# Allegro board ESP323.brd
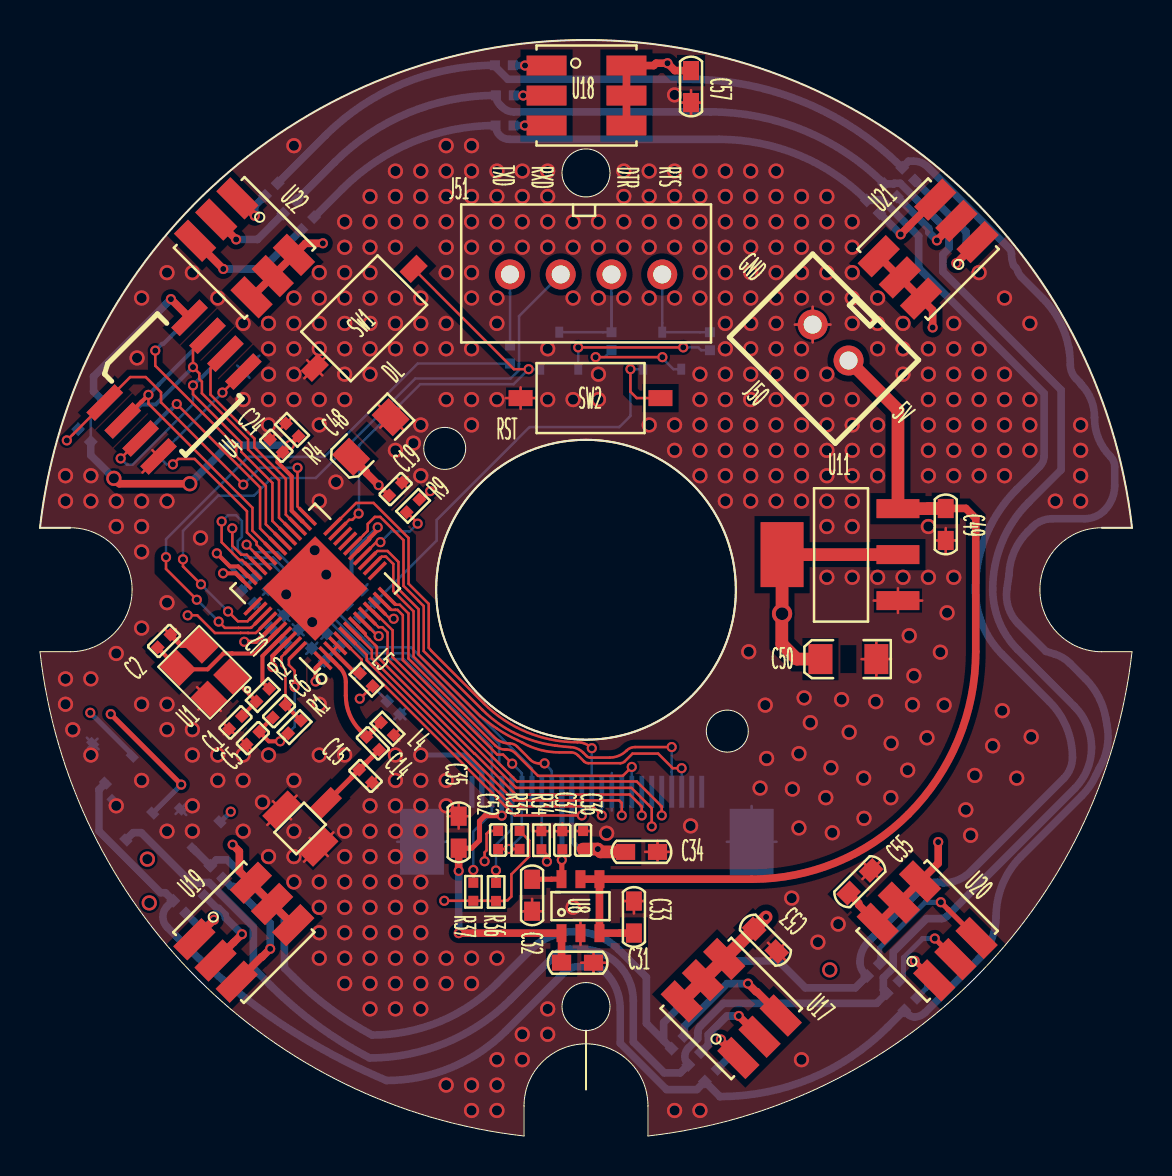
[diagram p0: board, top side]
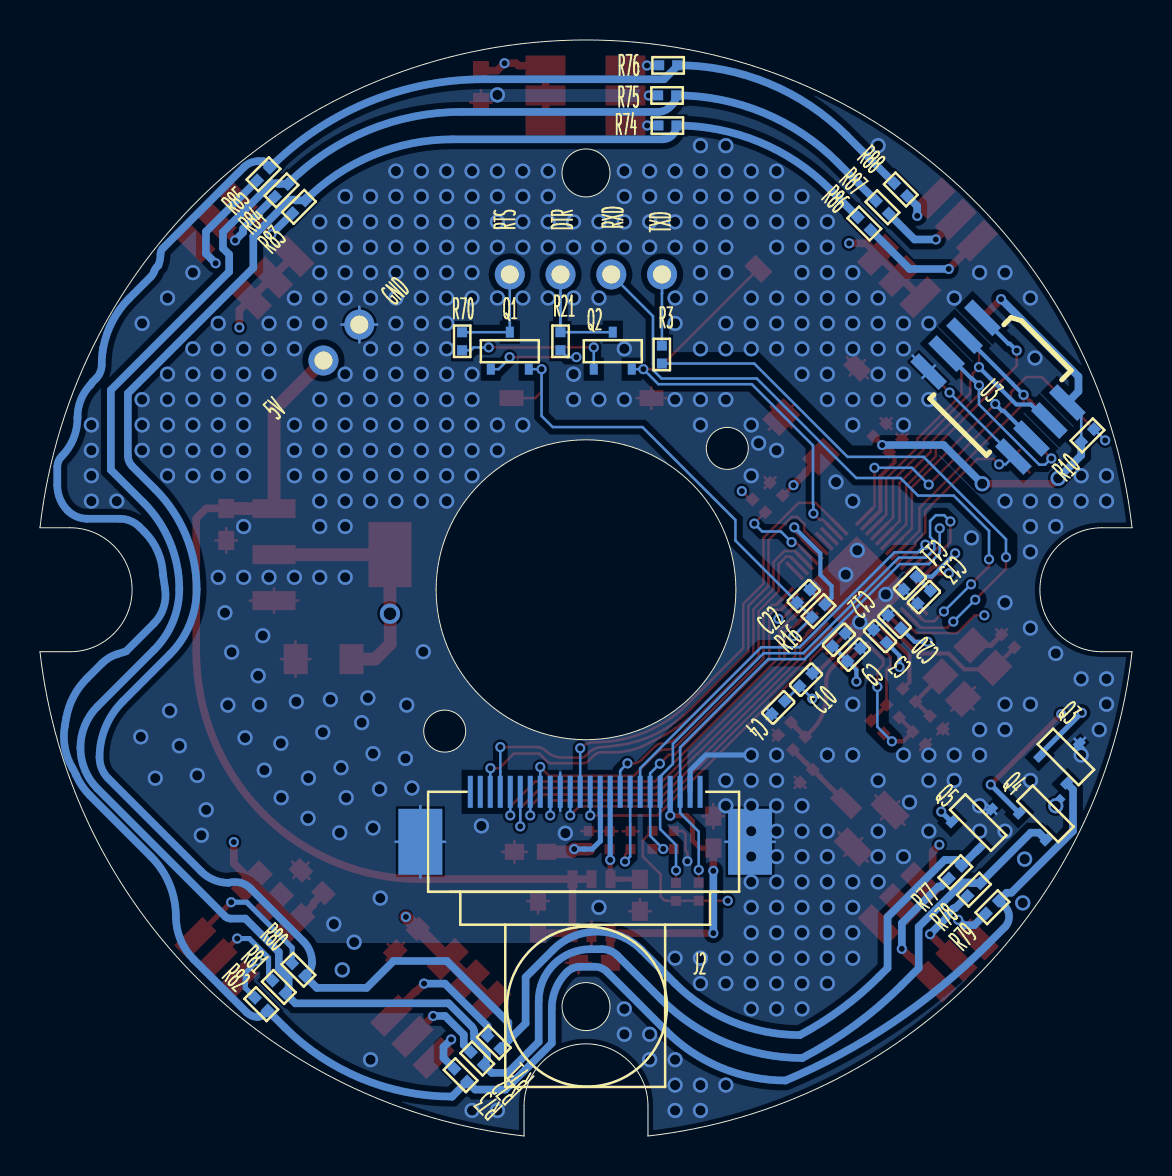
[diagram p1: board, bottom side, seen from below]

Outline 54.65 x 54.82 mm; copper layers: TOP, GND, SIG, BOTTOM. Coordinates in mm from the lower left corner of the outline.
Outline path: circle c20.25,34.4 r1.05 ; circle c27.32,48.17 r1.2 ; circle c27.32,27.32 r7.5 ; circle c27.32,6.47 r1.2 ; circle c34.4,20.25 r1.05 ; 0,30.42 arc(27.32,54.82) 54.65,30.42 53.14,30.42 arc(50.04,27.32) 53.14,24.22 54.65,24.22 arc(46.77,7.88) 30.42,0 30.42,1.51 arc(27.32,4.61) 24.22,1.51 24.22,0 arc(7.88,7.88) 0,24.22 1.51,24.22 arc(4.61,27.32) 1.51,30.42 0,30.42

## Design rules (mm)
net group DTR: nets DTR N16908429
net group RTS: nets N16908427 RTS
net group LED_B: nets LED_B N16960286 N16960785 N16961158 N16961522 N16961899 N16962291
net group LED_G: nets LED_G N16960306 N16960795 N16961160 N16961524 N16961901 N16962293
net group LED_R: nets LED_R N16960332 N16960797 N16961162 N16961526 N16961903 N16962295
net group RF: nets N16860839 N16860948 N16861170 N16861179 N16861214 N16861260 N16861530 N16861598 N16884685

## Placement (name value [footprint] x y rotation side)
C1  22pF/6.3V(10%)  [C0402]  10.11 21 225 top
C2  22pF/6.3V(10%)  [C0402]  5.89 24.44 45 top
C3  100pF/6.3V(10%)  [C0402]  12.29 24.68 45 bottom
C4  0.1uF/6.3V(10%)  [C0402]  17.38 21.75 315 bottom
C5  10nF/6.3V(10%)  [C0402]  10.98 20.22 225 top
C6  3.3nF/6.3V(10%)  [C0402]  12.29 21.57 225 top
C9  0.1uF/6.3V(10%)  [C0402]  14.24 23.76 135 bottom
C10  0.1uF/6.3V(10%)  [C0402]  16.63 22.51 135 bottom
C11  1uF/10V(20%)  [C0402]  10.79 27.98 315 bottom
C12  10uF/6.3V(20%)  [C0402]  14.99 24.51 135 bottom
C13  10uF/6.3V(20%)  [C0402]  10.09 27.27 315 bottom
C14  6.8pF  [C0402]  16.34 19.97 314.3 top
C15  2.4pF  [C0402]  16.61 17.69 135 top
C19  0.1uF/6.3V(10%)  [C0402]  17.48 32.04 45 top
C20  1uF/10V(20%)  [C0402]  11.57 25.41 45 bottom
C22  1uF/10V(20%)  [C0402]  16.75 26.69 135 bottom
C24  1uF/10V(20%)  [C0402]  12.15 34.21 135 top
C31  10uF/10V(20%)  [C0603]  27.7 8.67 180 top
C32  10uF/10V(20%)  [C0603]  24.63 11.24 90 top
C33  10uF/10V(20%)  [C0603]  29.72 11.75 270 top
C34  4.7uF/10V(20%)  [C0603]  29.3 14.21 0 top
C35  4.7uF/10V(20%)  [C0603]  20.95 14.4 90 top
C36  0.1uF/16V(10%)  [C0402]  27.18 14.35 90 top
C37  1uF/10V(20%)  [C0402]  26.14 14.35 90 top
C48  47uF/6.3V(20%)  [C1206]  15.57 33.98 225 top
C49  10uF/16V  [C0603]  45.33 31.39 270 top
C50  22uF/16V  [C1206]  39.05 23.86 180 top
C52  1uF/10V(20%)  [C0402]  22.93 14.36 90 top
C53  0.1uF/16V  [C0603]  35.74 10.36 315 top
C55  0.1uF/16V  [C0603]  40.46 12.16 45 top
C57  0.1uF/16V  [C0603]  32.58 53.29 270 top
J2  FFC_24P_0P5  [OV9650FSL_PCB]  21.61 17.22 180 bottom
J39  IPEX  [ECT8180001581]  14.3 16.65 135 top
J50  CON2  [XH_2_54_2P]  38.67 40.59 315 top
J51  CON4  [XH_2_54_4P]  23.52 43.1 0 top
L4  2.4nH  [R0402]  17.07 20.69 315 top
L5  2.0nH  [R0402]  16.01 23.14 315 top
Q1  S8050(NPN)  [SOT23-3]  31.14 40.21 180 bottom
Q2  S8050(NPN)  [SOT23-3]  25.99 40.21 180 bottom
Q3  S8050(NPN)  [SOT23-3]  2.64 19.63 225 bottom
Q4  S8050(NPN)  [SOT23-3]  3.66 16.79 225 bottom
Q5  S8050(NPN)  [SOT23-3]  7.03 16.35 225 bottom
R1  20K(5%)  [R0402]  13.06 20.78 225 top
R2  51R(5%)  [R0402]  10.84 21.74 45 top
R3  499R(1%)  [R0402]  23.53 38.64 90 bottom
R4  2K/NC  [R0402]  12.94 35 135 top
R9  10K(1%)(NC)  [R0402]  18.99 31.84 225 top
R10  10K(1%)  [R0402]  2.54 34.72 135 bottom
R16  10K(1%)  [R0402]  15.37 26.58 315 bottom
R21  12K(1%)  [R0402]  28.6 40.21 270 bottom
R34  10K(1%)  [R0402]  25.09 15.25 270 top
R35  10K(1%)  [R0402]  24 15.26 270 top
R36  3.3K(5%)  [R0402]  22.82 12.66 270 top
R37  3.3K(5%)  [R0402]  21.69 12.67 270 top
R70  12K(1%)  [R0402]  33.53 40.21 270 bottom
R71  470  [R0402]  31.61 4.37 45 bottom
R72  470  [R0402]  32.44 3.56 45 bottom
R73  470  [R0402]  33.27 2.73 45 bottom
R74  470  [R0402]  22.8 50.55 0 bottom
R75  470  [R0402]  22.81 52.05 0 bottom
R76  470  [R0402]  22.76 53.56 0 bottom
R77  470  [R0402]  8.53 13.52 315 bottom
R78  470  [R0402]  7.59 12.65 315 bottom
R79  470  [R0402]  6.67 11.77 315 bottom
R80  470  [R0402]  41.39 8 45 bottom
R81  470  [R0402]  42.37 7.14 45 bottom
R82  470  [R0402]  43.25 6.28 45 bottom
R83  470  [R0402]  41.37 46.8 315 bottom
R84  470  [R0402]  42.25 47.62 315 bottom
R85  470  [R0402]  43.15 48.43 315 bottom
R86  470  [R0402]  13.72 45.96 225 bottom
R87  470  [R0402]  12.81 46.77 225 bottom
R88  470  [R0402]  11.9 47.66 225 bottom
SW1  SW PUSHBUTTON  [KEY_3X6]  13.75 38.43 45 top
SW2  SW PUSHBUTTON  [KEY_3X6]  24.05 36.91 0 top
U1  40MHz+/-10ppm  [CRY_3225]  8.46 21.86 135 top
U2  ESP32-D0WD  [QFN48_5X5]  13.77 27.39 135 top
U3  EN25QH128A  [RZ7889]  8.86 35.2 225 bottom
U4  PSRAM64H  [RZ7889]  8.97 35.32 45 top
U8  RT9011-BM-PJ6  [SOT-23-6]  27.05 11.5 0 top
U11  TLV1117-33IDCY  [SOT223]  42.94 26.78 90 top
U17  RGB  [RGB_6]  34.59 6.38 315 top
U18  RGB  [RGB_6]  27.35 52.05 180 top
U19  RGB  [RGB_6]  10.2 10.19 225 top
U20  RGB  [RGB_6]  44.4 10.26 315 top
U21  RGB  [RGB_6]  44.45 44.36 45 top
U22  RGB  [RGB_6]  10.23 44.43 135 top

## Library data of the parts
C1-C6 C9-C15 C19 C20 C22 C24 C31-C37 C48-C50 C52 C53 C55 C57 = CAP NP
J2 = CON24_4
J39 = IPEX_0
J50 = CON2
J51 = CON4
L4 L5 = CHOKE
Q1-Q5 = NPN BCE
R1-R4 R9 R10 = RESISTOR
R16 = RESISTOR_0: signal model: DEFAULT_RESISTOR_10000OHM_1_2
R21 R34-R37 R70-R88 = RESISTOR_0: signal model: DEFAULT_RESISTOR_200OHM_1_2
SW1 = SW PUSHBUTTON_0
SW2 = SW PUSHBUTTON
U1 = X1_1
U2 = ESP8080_24
U3 = FLASH_3
U4 = PN18S32
U8 = NCP1117_3
U11 = TLV1117-33IDCY
U17-U22 = LED_RGB

## Footprints (pads in the part's own frame, mm; a bottom-side part is the same pattern mirrored in y, then rotated)
C0402
  rect 0.5x0.5 smd: 1(0,0) 2(0.9,0)
C0603
  rect 0.96x0.8 smd: 1(0,0) 2(1.6,0)
C1206
  rect 1.2x1.5 smd: 1(0,0) 2(-2.8,0)
CRY_3225
  rect 1.4x1.2 smd: 1(0,-1.6) 2(2.2,-1.6) 3(2.2,0) 4(0,0)
ECT8180001581
  rect 0.8x1.5 smd: 1(0,0)
  rect 1x1.8 smd: 2(-1.3,1.8) 3(1.3,1.8)
KEY_3X6
  rect 1.2x0.8 smd: 1(0,0) 2(7,0)
OV9650FSL_PCB
  rect 0.25x1.6 smd: 1(0,0) 2(-0.5,0) 3(-1,0) 4(-1.5,0) 5(-2,0) 6(-2.5,0) 7(-3,0) 8(-3.5,0) 9(-4,0) 10(-4.5,0) 11(-5,0) 12(-5.5,0) 13(-6,0) 14(-6.5,0) 15(-7,0) 16(-7.5,0) 17(-8,0) 18(-8.5,0) 19(-9,0) 20(-9.5,0) 21(-10,0) 22(-10.5,0) 23(-11,0) 24(-11.5,0)
  rect 2.2x3.3 smd: 25(-14,-2.5) 26(2.5,-2.5)
QFN48_5X5
  rect 1.2x0.18 smd: 1(-2.825,2.275) 2(-2.825,1.925) 3(-2.825,1.575) 4(-2.825,1.225) 5(-2.825,0.875) 6(-2.825,0.525) 7(-2.825,0.175) 8(-2.825,-0.175) 9(-2.825,-0.525) 10(-2.825,-0.875) 11(-2.825,-1.225) 12(-2.825,-1.575) 13(-2.825,-1.925) 14(-2.825,-2.275) 25(2.825,-2.275) 26(2.825,-1.925) 27(2.825,-1.575) 28(2.825,-1.225) 29(2.825,-0.875) 30(2.825,-0.525) 31(2.825,-0.175) 32(2.825,0.175) 33(2.825,0.525) 34(2.825,0.875) 35(2.825,1.225) 36(2.825,1.575) 37(2.825,1.925) 38(2.825,2.275)
  rect 0.18x1.2 smd: 15(-1.575,-2.825) 16(-1.225,-2.825) 17(-0.875,-2.825) 18(-0.525,-2.825) 19(-0.175,-2.825) 20(0.175,-2.825) 21(0.525,-2.825) 22(0.875,-2.825) 23(1.225,-2.825) 24(1.575,-2.825) 39(1.575,2.825) 40(1.225,2.825) 41(0.875,2.825) 42(0.525,2.825) 43(0.175,2.825) 44(-0.175,2.825) 45(-0.525,2.825) 46(-0.875,2.825) 47(-1.225,2.825) 48(-1.575,2.825)
  rect 3.7x3.7 smd: 49(0,0)
R0402
  rect 0.5x0.5 smd: 1(0,0) 2(0.9,0)
RGB_6
  rect 2x1 smd: 1(2,-1.5) 2(2,0) 3(2,1.5) 4(-2,1.5) 5(-2,0) 6(-2,-1.5)
RZ7889
  rect 2x0.6 smd: 1(-3.082,5.025) 2(-3.082,3.755) 3(-3.082,2.485) 4(-3.082,1.215) 5(2.918,1.215) 6(2.918,2.485) 7(2.918,3.755) 8(2.918,5.025)
SOT23-3
  rect 0.4x0.55 smd: 1(-0.95,-1.85) 2(0.95,-1.85) 3(0,0)
SOT223
  rect 0.95x2.15 smd: 1(0,0) 2(2.3,0) 3(4.6,0)
  rect 3.25x2.15 smd: 4(2.3,5.8)
SOT-23-6
  rect 0.5x0.9 smd: 1(-0.95,-1.35) 2(0,-1.35) 3(0.95,-1.35) 4(0.95,1.35) 5(0,1.35) 6(-0.95,1.35)
XH_2_54_2P
  round 1.5 hole 0.9: 1(0,0) 2(2.54,0)
XH_2_54_4P
  round 1.5 hole 0.9: 1(0,0) 2(2.54,0) 3(5.08,0) 4(7.62,0)

## Nets
AGND: C1.2 C2.2 C3.2 C4.2 C5.2 C9.2 C10.2 C11.2 C12.2 C13.2 C15.1 C19.2 C20.2 C22.2 C24.2 C31.1 C32.1 C33.1 C34.2 C35.2 C36.2 C37.2 C48.2 C49.2 C50.2 C52.2 C53.2 C55.2 C57.2 J2.2(AGND) J2.15(DGND) J2.25(GND#25) J2.26(GND#26) J39.2(GND1) J39.3(GND2) J50.1 L4.2 Q3.3(E) Q4.3(E) Q5.3(E) R4.2 R34.1 SW1.1 SW2.1 U1.2(GND#2) U1.4(GND#4) U2.49(GND) U3.4(GND) U4.4(VSS) U8.2(GND) U11.1(ADJ/GND)
AVDD_2V8: C31.2 C35.1 J2.4(AVDD) U8.1(VOUT2)
DVDD_1V3: C32.2 C37.1 J2.10(DVDD) U8.6(VOUT1)
VBUS: C33.2 C49.1 J50.2 U8.3(EN2) U8.4(EN1) U8.5(VIN) U11.3(INPUT)
VDD_SDIO: C24.1 R4.1 R10.1 U2.26(VDD_SDIO) U3.8(VCC) U4.8(VDD)
B: Q5.1(B) U2.12(32K_XP)
CAM_RESET: C52.1 J2.6(RESET) R35.2 U2.13(32K_XN)
DOVDD_3V3: C3.1 C4.1 C9.1 C10.1 C11.1 C12.1 C13.1 C19.1 C20.1 C34.1 C36.1 C48.1 C50.1 C53.1 C55.1 C57.1 J2.11(DOVDD) L5.2 R9.1 R16.1 R35.1 R36.2 R37.2 U2.1(VDDA#1) U2.19(VDD3P3_RTC) U2.37(VDD3P3_CPU) U2.43(VDDA#43) U2.46(VDDA#46) U11.2(OUTPUT#2) U11.4(OUTPUT#4) U17.4(BA) U17.5(GA) U17.6(RA) U18.4(BA) U18.5(GA) U18.6(RA) U19.4(BA) U19.5(GA) U19.6(RA) U20.4(BA) U20.5(GA) U20.6(RA) U21.4(BA) U21.5(GA) U21.6(RA) U22.4(BA) U22.5(GA) U22.6(RA)
DTR: J51.3 Q2.3(E) R21.1
DVP_HREF: J2.9(HREF) U2.16(GPIO27)
DVP_PCLK: J2.17(PCLK) U2.14(GPIO25)
DVP_VSYNC: J2.7(VSYNC) U2.34(GPIO5)
DVP_Y2: J2.19(Y2) U2.10(VDET_1)
DVP_Y3: J2.21(Y3) U2.20(MTCK)
DVP_Y4: J2.22(Y4) U2.17(MTMS)
DVP_Y5: J2.20(Y5) U2.11(VDET_2)
DVP_Y6: J2.18(Y6) U2.8(SENSOR_VN)
DVP_Y7: J2.16(Y7) U2.7(SENSOR_CAPN)
DVP_Y8: J2.14(Y8) U2.6(SENSOR_CAPP)
DVP_Y9: J2.12(Y9) U2.5(SENSOR_VP)
EN: C22.1 Q1.2(C) R16.2 SW2.2 U2.9(CHIP_PU)
FLASH_CLK: U2.31(SD_CLK) U3.6(CLK)
G: Q4.1(B) U2.38(GPIO19)
I2C_SCL: J2.5(SCL) R36.1 U2.36(GPIO23)
I2C_SDA: J2.3(SDA) R37.1 U2.35(GPIO18)
IO0: Q2.2(C) SW1.2 U2.23(GPIO0)
IO4: J2.13(XCLK) U2.24(GPIO4)
IO12: R9.2 U2.18(MTDI)
IO16: R10.2 U2.25(GPIO16) U4.1(CS#)
IO17: U2.27(GPIO17) U4.6(SCLK)
IO21: Q3.1(B) U2.42(GPIO21)
LED_B: Q5.2(C) R71.1 R74.1 R77.1 R80.1 R83.1 R86.1
LED_G: Q4.2(C) R72.1 R75.1 R78.1 R81.1 R84.1 R87.1
LED_R: Q3.2(C) R73.1 R76.1 R79.1 R82.1 R85.1 R88.1
PWDN: J2.8(PWDN) R34.2
RTS: J51.4 Q1.3(E) R70.1
RXD0: J51.2 U2.40(U0RXD)
SCS/CMD: U2.30(SD_CMD) U3.1(/CS)
SDI/SD1: U2.33(SD_DATA_1) U3.5(DI) U4.5(SI/SIO0)
SDO/SD0: U2.32(SD_DATA_0) U3.2(DO) U4.2(SO/SIO1)
SHD/SD2: U2.28(SD_DATA_2) U3.7(/HOLD) U4.7(SIO3)
SWP/SD3: U2.29(SD_DATA_3) U3.3(/WP) U4.3(SIO2)
TXD0: J51.1 R3.2
N16860839: C5.1 C6.2 R1.2 U2.48(CAP1)
N16860948: L5.1 U2.3(VDD3P3#3) U2.4(VDD3P3#4)
N16861170: C14.2 C15.2 J39.1(RF)
N16861179: C2.1 U1.3(XOUT) U2.44(XTAL_N)
N16861214: C1.1 R2.1 U1.1(XIN)
N16861260: C6.1 R1.1 U2.47(CAP2)
N16861530: R3.1 U2.41(U0TXD)
N16861598: R2.2 U2.45(XTAL_P)
N16884685: C14.1 L4.1 U2.2(LNA_IN)
N16908427: Q2.1(B) R70.2
N16908429: Q1.1(B) R21.2
N16960286: R71.2 U17.3(BK)
N16960306: R72.2 U17.2(GK)
N16960332: R73.2 U17.1(RK)
N16960785: R74.2 U18.3(BK)
N16960795: R75.2 U18.2(GK)
N16960797: R76.2 U18.1(RK)
N16961158: R77.2 U19.3(BK)
N16961160: R78.2 U19.2(GK)
N16961162: R79.2 U19.1(RK)
N16961522: R80.2 U20.3(BK)
N16961524: R81.2 U20.2(GK)
N16961526: R82.2 U20.1(RK)
N16961899: R83.2 U21.3(BK)
N16961901: R84.2 U21.2(GK)
N16961903: R85.2 U21.1(RK)
N16962291: R86.2 U22.3(BK)
N16962293: R87.2 U22.2(GK)
N16962295: R88.2 U22.1(RK)

Pads without a net: J2 1 23 24; U2 15 21 22 39

## Via types
v1: diameter 0.508, hole 0.305, TOP to BOTTOM, 96 vias
v2: diameter 0.762, hole 0.508, TOP to BOTTOM, 417 vias
v3: diameter 1.016, hole 0.635, TOP to BOTTOM, 1 via

## Routing (per net, layer and track width the routed paths; a pad name or vN(x,y) marks a point on that pad's centre or on a via; arc(x,y) is an arc through that point)
AGND: length 105.8
  TOP w0.127: 27.05,10.74 U8.2 27.05,9.56 ; 23.31,36.91 SW2.1 ; SW2.1 24.05,36.37 ; SW2.1 24.79,36.91 ; SW2.1 24.05,37.45 ; 6.8,25.36 C2.2 6.25,25.36 ; 29.18,11.75 C33.1 ; C33.1 29.72,11.13 ; C33.1 30.26,11.75 ; U11.1 44.15,26.78 ; U11.1 42.94,27.4 ; U11.1 42.94,26.17 ; U11.1 41.72,26.78 ; 30.28,14.21 C34.2 ; C34.2 30.9,14.75 ; C34.2 30.9,13.67 ; C34.2 31.52,14.21 ; 9.19,20.09 C1.2 ; C1.2 9.19,20.64 ; C1.2 9.74,20.09 ; C50.2 41.86,24.75 ; C50.2 41.12,23.86 ; C50.2 41.86,22.97 ; C50.2 42.59,23.86 ; C5.2 10.61,19.31 ; C5.2 10.06,19.31 ; C5.2 10.06,19.86 ; 7.93,21.34 U1.4 ; U1.4 9.05,21.27 ; U1.4 7.86,22.45 ; 27.57,15.25 C36.2 26.79,15.25 ; 16.92,36.59 C48.2 ; C48.2 18.18,35.33 ; C48.2 17.03,35.43 ; C48.2 18.07,36.48 ; C57.2 33.12,51.69 ; C57.2 32.58,51.07 ; C57.2 32.58,52.31 ; C57.2 32.04,51.69 ; R4.2 12.58,35.92 ; R4.2 12.03,35.36 ; R4.2 12.03,35.92 ; C19.2 18.39,32.96 ; C19.2 18.39,32.4 ; C19.2 17.84,32.96 ; C55.2 42.03,13.73 ; C55.2 41.97,12.91 ; C55.2 41.15,12.85 ; C55.2 41.21,13.67 ; C32.1 24.63,11.86 ; C32.1 25.17,11.24 ; C32.1 24.09,11.24 ; 37.78,40.59 J50.1 ; J50.1 38.67,41.48 ; J50.1 38.67,39.7 ; J50.1 39.56,40.59 ; 5.62,34.31 U4.4 5.13,33.19 ; C52.2 22.49,15.26 22.35,15.12 22.35,14.28 22.25,14.19 v1(22.25,13.74) ; 13.21,13.72 J39.2 ; J39.2 13.5,14.91 ; J39.2 14.68,15.19 ; J39.2 14.4,14 ; R34.1 25.48,15.25 ; R34.1 25.09,15.64 ; R34.1 24.7,15.25 ; 13.37,38.81 SW1.1 ; SW1.1 14.27,38.95 ; SW1.1 13.23,37.9 ; SW1.1 14.13,38.05 ; 36.49,8.85 C53.2 ; C53.2 36.43,9.67 ; C53.2 37.31,8.79 ; C53.2 37.25,9.61 ; C37.2 26.53,15.25 ; C37.2 26.14,15.64 ; C37.2 25.75,15.25 ; 27.08,8.67 C31.1 ; C31.1 27.7,8.13 ; C31.1 28.32,8.67 ; C31.1 27.7,9.21 ; C15.1 16.89,17.41 ; C15.1 16.89,17.97 ; C15.1 16.33,17.41 ; 11.23,35.12 C24.2 11.78,35.12 ; J39.3 12.56,15.84 ; J39.3 11.66,16.75 ; J39.3 11.38,15.56 ; J39.3 12.85,17.03 ; 20.95,15.38 C35.2 ; C35.2 20.95,16.62 ; C35.2 20.41,16 ; C35.2 21.49,16 ; 45.33,29.17 C49.2 ; C49.2 45.33,30.41 ; C49.2 45.87,29.79 ; C49.2 44.79,29.79 ; 17.98,19.78 L4.2 17.98,20.33
  TOP w0.254: C2.2 7.06,24.55 U1.2
  GND w0.127: 37.78,40.59 J50.1 ; J50.1 39.56,40.59 ; J50.1 38.67,41.48 ; J50.1 38.67,39.7
  BOTTOM w0.127: Q3.3 2.88,19.87 ; Q3.3 2.4,19.39 ; Q3.3 2.93,19.34 ; Q3.3 2.35,19.93 ; C10.2 16.27,23.42 ; C10.2 15.72,23.42 ; C10.2 15.72,22.87 ; 13.33,24.12 C9.2 ; C9.2 13.88,24.67 ; C9.2 13.33,24.67 ; C13.2 11,26.36 ; C13.2 11,26.91 ; C13.2 10.45,26.36 ; 11.93,26.32 C20.2 ; C20.2 12.48,25.77 ; C20.2 12.48,26.32 ; 34.37,14.72 J2.25 ; J2.25 35.61,16.51 ; J2.25 35.61,12.93 ; J2.25 36.85,14.72 ; C3.2 13.2,25.04 ; C3.2 12.65,25.6 ; C3.2 13.2,25.6 ; 37.78,40.59 J50.1 ; J50.1 38.67,39.7 ; J50.1 38.67,41.48 ; J50.1 39.56,40.59 ; C4.2 18.29,20.84 ; C4.2 17.74,20.84 ; C4.2 18.29,21.39 ; 15.84,27.05 C22.2 ; C22.2 16.39,27.6 ; C22.2 15.84,27.6 ; J2.26 19.11,16.51 ; J2.26 17.87,14.72 ; J2.26 19.11,12.93 ; J2.26 20.35,14.72 ; U3.4 10.49,37.92 ; U3.4 9.86,38.55 ; U3.4 10.98,39.04 ; 14.08,25.42 C12.2 14.08,24.87 ; Q5.3 7.32,16.06 ; Q5.3 6.79,16.11 ; Q5.3 7.27,16.59 ; C11.2 11.71,27.07 ; C11.2 11.71,27.62 ; C11.2 11.15,27.07 ; 28.61,16.28 J2.15 28.61,18.16
  BOTTOM w0.254: J2.2 22.11,18.27 21.33,19.06 v2(19.06,19.06)
  vias: v2(1.28,33.03) v2(1.28,31.76) v2(1.28,22.87) v2(1.28,21.6) v2(1.64,20.32) v2(2.55,33.03) v2(2.55,31.76) v2(2.55,22.87) v2(2.55,19.06) v2(3.82,31.76) v2(3.82,30.49) v2(3.82,24.14) v2(3.82,16.52) v2(4.86,38.92) v2(5.09,41.92) v2(5.09,31.76) v2(5.09,30.49) v2(5.09,29.22) v2(5.09,25.41) v2(5.09,21.6) v2(5.09,17.79) v2(6.36,43.19) v2(6.36,31.76) v2(6.36,26.68) v2(6.36,21.6) v2(6.36,20.33) v2(6.36,15.25) v2(7.63,43.19) v2(7.63,20.33) v2(7.63,19.06) v2(7.63,16.52) v2(7.63,15.25) v2(8.03,29.92) v2(8.9,41.92) v2(8.9,19.06) v2(8.9,17.79) v2(10.17,40.65) v2(10.17,36.84) v2(10.17,19.06) v2(10.17,17.79) v2(10.17,15.25) v2(11.13,16.7) v2(11.44,40.65) v2(11.44,39.38) v2(11.44,38.11) v2(11.44,36.84) v2(11.44,35.57) v2(11.44,19.06) v2(11.44,13.98) v2(12.32,27.09) v2(12.71,49.54) v2(12.71,41.92) v2(12.71,40.65) v2(12.71,39.38) v2(12.71,38.11) v2(12.71,36.84) v2(12.71,17.79) v2(12.71,15.25) v2(12.71,13.98) v2(12.71,12.71) v2(13.62,25.71) v2(13.75,29.3) v2(13.98,43.19) v2(13.98,41.92) v2(13.98,40.65) v2(13.98,39.38) v2(13.98,36.84) v2(13.98,35.57) v2(13.98,31.76) v2(13.98,21.6) v2(13.98,19.06) v2(13.98,12.71) v2(13.98,11.44) v2(13.98,10.17) v2(13.98,8.9) v2(14.33,28.08) v2(14.81,32.71) v2(15.25,45.73) v2(15.25,44.46) v2(15.25,43.19) v2(15.25,41.92) v2(15.25,40.65) v2(15.25,39.38) v2(15.25,38.11) v2(15.25,36.84) v2(15.25,19.06) v2(15.25,15.25) v2(15.25,13.98) v2(15.25,12.71) v2(15.25,11.44) v2(15.25,10.17) v2(15.25,8.9) v2(15.25,7.63) v2(16.52,47) v2(16.52,45.73) v2(16.52,44.46) v2(16.52,43.19) v2(16.52,41.92) v2(16.52,40.65) v2(16.52,39.38) v2(16.52,38.11) v2(16.52,16.52) v2(16.52,15.25) v2(16.52,13.98) v2(16.52,12.71) v2(16.52,11.44) v2(16.52,10.17) v2(16.52,8.9) v2(16.52,7.63) v2(16.52,6.36) v2(17.79,48.27) v2(17.79,47) v2(17.79,45.73) v2(17.79,44.46) v2(17.79,41.92) v2(17.79,40.65) v2(17.79,39.38) v2(17.79,34.3) v2(17.79,19.06) v2(17.79,17.79) v2(17.79,16.52) v2(17.79,15.25) v2(17.79,13.98) v2(17.79,12.71) v2(17.79,11.44) v2(17.79,10.17) v2(17.79,8.9) v2(17.79,7.63) v2(17.79,6.36) v2(18.69,34.66) v2(19.06,48.27) v2(19.06,47) v2(19.06,45.73) v2(19.06,41.92) v2(19.06,40.65) v2(19.06,39.38) v2(19.06,35.57) v2(19.06,33.03) v2(19.06,17.79) v2(19.06,16.52) v2(19.06,15.25) v2(19.06,13.98) v2(19.06,12.71) v2(19.06,11.44) v2(19.06,10.17) v2(19.06,8.9) v2(19.06,7.63) v2(19.06,6.36) v2(20.33,49.54) v2(20.33,48.27) v2(20.33,47) v2(20.33,45.73) v2(20.33,44.46) v2(20.33,43.19) v2(20.33,40.65) v2(20.33,39.38) v2(20.33,36.84) v2(20.33,17.79) v2(20.33,16.52) v2(20.33,8.9) v2(20.33,7.63) v2(20.33,2.55) v2(21.6,49.54) v2(21.6,48.27) v2(21.6,47) v2(21.6,45.73) v2(21.6,44.46) v2(21.6,43.19) v2(21.6,41.92) v2(21.6,39.38) v2(21.6,36.84) v2(21.6,35.57) v2(21.6,8.9) v2(21.6,7.63) v2(21.6,2.55) v2(21.6,1.28) v2(22.87,48.27) v2(22.87,47) v2(22.87,45.73) v2(22.87,44.46) v2(22.87,41.92) v2(22.87,40.65) v2(22.87,36.84) v2(22.87,8.9) v2(22.87,3.82) v2(22.87,2.55) v2(22.87,1.28) v2(24.14,48.27) v2(24.14,47) v2(24.14,45.73) v2(24.14,44.46) v2(24.14,5.09) v2(24.14,3.82) v2(25.41,48.27) v2(25.41,47) v2(25.41,45.73) v2(25.41,44.46) v2(25.41,39.38) v2(25.41,36.84) v2(25.41,6.36) v2(25.41,5.09) v2(26.68,45.73) v2(26.68,44.46) v2(26.68,41.92) v2(26.68,36.84) v2(26.68,11.44) v2(27.95,45.73) v2(27.95,44.46) v2(27.95,41.92) v2(27.95,38.11) v2(27.95,36.84) v2(28.36,15.15) v2(29.22,48.27) v2(29.22,47) v2(29.22,45.73) v2(29.22,44.46) v2(29.22,41.92) v2(30.49,48.27) v2(30.49,47) v2(30.49,45.73) v2(30.49,44.46) v2(30.49,41.92) v2(30.49,35.57) v2(31.76,52.08) v2(31.76,48.27) v2(31.76,47) v2(31.76,45.73) v2(31.76,44.46) v2(31.76,41.92) v2(31.76,35.57) v2(31.76,34.3) v2(31.76,1.28) v2(32.56,15.51) v2(33.03,48.27) v2(33.03,47) v2(33.03,45.73) v2(33.03,44.46) v2(33.03,43.19) v2(33.03,41.92) v2(33.03,38.11) v2(33.03,36.84) v2(33.03,35.57) v2(33.03,34.3) v2(33.03,33.03) v2(33.03,1.28) v2(34.3,48.27) v2(34.3,47) v2(34.3,45.73) v2(34.3,44.46) v2(34.3,43.19) v2(34.3,41.92) v2(34.3,40.65) v2(34.3,39.38) v2(34.3,38.11) v2(34.3,36.84) v2(34.3,35.57) v2(34.3,34.3) v2(34.3,33.03) v2(34.3,31.76) v2(35.47,24.22) v2(35.57,48.27) v2(35.57,47) v2(35.57,45.73) v2(35.57,44.46) v2(35.57,43.19) v2(35.57,41.92) v2(35.57,40.65) v2(35.57,39.38) v2(35.57,38.11) v2(35.57,36.84) v2(35.57,35.57) v2(35.57,34.3) v2(35.57,33.03) v2(35.57,31.76) v2(36.04,17.41) v2(36.29,21.55) v2(36.36,18.89) v2(36.84,48.27) v2(36.84,47) v2(36.84,45.73) v2(36.84,44.46) v2(36.84,43.19) v2(36.84,41.92) v2(36.84,40.65) v2(36.84,39.38) v2(36.84,38.11) v2(36.84,36.84) v2(36.84,35.57) v2(36.84,34.3) v2(36.84,33.03) v2(36.84,31.76) v2(37.65,17.35) v2(37.62,11.9) v2(37.98,19.13) v2(37.98,15.41) v2(38.11,47) v2(38.11,45.73) v2(38.11,44.46) v2(38.11,43.19) v2(38.11,41.92) v2(38.11,39.38) v2(38.11,38.11) v2(38.11,36.84) v2(38.11,35.57) v2(38.11,34.3) v2(38.11,33.03) v2(38.11,31.76) v2(38.11,3.82) v2(38.24,21.92) v2(38.55,20.68) v2(38.93,9.7) v2(39.32,16.92) v2(39.38,47) v2(39.38,45.73) v2(39.38,44.46) v2(39.38,43.19) v2(39.38,41.92) v2(39.38,38.11) v2(39.38,36.84) v2(39.38,35.57) v2(39.38,34.3) v2(39.38,33.03) v2(39.38,31.76) v2(39.38,30.49) v2(39.38,27.95) v2(39.58,18.42) v2(39.65,15.17) v2(39.94,10.6) v2(40.12,21.83) v2(40.5,20.19) v2(40.65,45.73) v2(40.65,44.46) v2(40.65,43.19) v2(40.65,41.92) v2(40.65,40.65) v2(40.65,36.84) v2(40.65,35.57) v2(40.65,34.3) v2(40.65,33.03) v2(40.65,31.76) v2(40.65,30.49) v2(40.65,27.95) v2(41.22,17.9) v2(41.24,15.89) v2(41.82,21.73) v2(41.92,41.92) v2(41.92,40.65) v2(41.92,39.38) v2(41.92,35.57) v2(41.92,34.3) v2(41.92,33.03) v2(41.92,27.95) v2(42.6,19.64) v2(42.58,16.92) v2(43.19,40.65) v2(43.19,39.38) v2(43.19,38.11) v2(43.19,27.95) v2(43.42,18.3) v2(43.5,25.03) v2(43.66,21.57) v2(43.73,23.02) v2(44.46,39.38) v2(44.46,38.11) v2(44.46,36.84) v2(44.46,35.57) v2(44.46,34.3) v2(44.46,33.03) v2(44.46,30.49) v2(44.46,27.95) v2(44.39,19.92) v2(45.06,24.2) v2(45.25,21.55) v2(45.39,26.17) v2(45.73,40.65) v2(45.73,39.38) v2(45.73,38.11) v2(45.73,36.84) v2(45.73,35.57) v2(45.73,34.3) v2(45.73,33.03) v2(45.73,27.95) v2(46.33,16.32) v2(46.57,15.04) v2(46.78,18.04) v2(47,43.19) v2(47,39.38) v2(47,38.11) v2(47,36.84) v2(47,35.57) v2(47,34.3) v2(47,33.03) v2(47.67,19.52) v2(48.16,21.27) v2(48.27,41.92) v2(48.27,38.11) v2(48.27,36.84) v2(48.27,35.57) v2(48.27,34.3) v2(48.27,33.03) v2(48.88,17.9) v2(49.54,40.65) v2(49.54,36.84) v2(49.54,35.57) v2(49.54,34.3) v2(49.6,19.97) v2(50.81,31.76) v2(52.08,35.57) v2(52.08,34.3) v2(52.08,33.03) v2(52.08,31.76)
AVDD_2V8: length 15.5
  TOP w0.254: v1(23.11,16.03) 22.27,16.03 22,15.75 22,14.78 21.61,14.4 C35.1
  TOP w0.381: C35.1 20.95,14.4 v1(20.95,13.26) ; C31.2 26.1,10.15 U8.1 v1(20.95,10.15)
  BOTTOM w0.254: v1(23.11,16.03) 23.11,17.21 J2.4
  BOTTOM w0.381: v1(20.95,10.15) v1(20.95,13.26)
DVDD_1V3: length 6.4
  TOP w0.254: C37.1 26.11,14.32 v1(26.11,13.81) 26.11,12.86 U8.6 25.59,12.85 25.59,12.84 C32.2
  BOTTOM w0.254: J2.10 v1(26.11,13.81)
VBUS: length 49.9
  TOP w0.381: U8.4 U8.3 29,10.15 29.01,10.15 C33.2 ; U8.4 U8.5 ; U8.4 35.62,12.85 arc(39.86,13.69) 43.46,16.09 arc(45.95,19.83) 46.83,24.23 46.83,30.89 46.33,31.39 45.33,31.39 C49.1
  TOP w0.635: J50.2 42.94,36.32 U11.3 44.48,31.38 44.48,31.39 C49.1
VDD_SDIO: length 27.8
  TOP w0.203: C24.1 11.89,33.95 11.89,33.7 12.6,33 12.6,31.28 13.13,30.75 U2.26
  TOP w0.254: C24.1 v1(12.5,34.56) R4.1
  TOP w0.381: v2(7.49,32.63) 3.97,32.63 3.7,32.9 v2(3.7,32.9) ; U4.8 v1(6.55,41.86)
  BOTTOM w0.127: R10.1 2.54,35.99 U3.8
  BOTTOM w0.381: v1(6.55,41.86) 2.68,37.99 2.68,37.24 U3.8 ; R10.1 2.54,34.05 v2(3.7,32.9) ; v1(12.5,34.56) 9.43,34.56 v2(7.49,32.63)
B: length 14.9
  TOP w0.127: v1(17.7,25.87) 17.51,25.87 U2.12
  SIG w0.203: v1(17.7,25.87) 17.7,24.37 9.9,16.57 9.89,16.57 v1(9.55,16.22)
  BOTTOM w0.254: Q5.1 9.04,15.71 v1(9.55,16.22)
CAM_RESET: length 18.3
  TOP w0.127: R35.2 24,14.36 v1(23.46,14.36) 23.46,14.36 C52.1 ; U2.13 17.56,26.32 17.78,26.32 17.79,26.32 17.89,26.32 18.16,26.05 18.16,23.81 22.88,19.08 23.18,19.08 v1(23.63,18.63)
  GND w0.127: 22.64,19.34 22.9,19.08 23.18,19.08 v1(23.63,18.63)
  BOTTOM w0.127: v1(23.63,18.63) 24.11,18.14 J2.6 24.11,15.01 v1(23.46,14.36)
DOVDD_3V3: length 88.6
  TOP w0.127: v1(20.23,11.77) R37.2 22.38,11.77 22.38,11.76 R36.2 23.26,11.76 23.29,11.79 23.4,11.79 23.59,11.98 23.59,13.09 24.48,13.98 24.48,14.78 R35.1 ; v1(16,21.88) 16.02,21.88 L5.2 ; R9.1 19.11,31.84 v1(19.53,32.26)
  TOP w0.203: U2.43 11.06,24.93 11.02,24.93 10.81,24.72 v1(10.22,24.72) ; U2.19 16.48,29.85 16.48,29.89 16.9,30.32 v1(16.9,30.45) ; C19.1 17.46,32.04 v1(16.94,32.56) ; v1(11.63,23.46) 11.63,24.01 U2.46 ; v1(13.79,22.73) 13.79,23.41 U2.1 ; U2.37 10.38,28.02 9.91,28.49 9.5,28.49 v1(8.85,29.15)
  TOP w0.381: v1(44.95,14.7) 44.95,13.64 U20.4 U20.5 U20.6 40.97,11.57 40.97,11.65 C55.1 ; C48.1 16.32,33.22 16.32,33.18 v1(16.94,32.56) ; U21.4 U21.5 U21.6 44.67,41.31 v1(44.67,40.44) ; v1(9.64,14.57) 9.98,14.24 9.98,13.25 U19.6 U19.5 U19.4 ; C57.1 31.77,53.29 v1(31.4,53.66) 30.83,53.66 30.72,53.55 U18.6 U18.5 U18.4 ; U22.4 U22.5 U22.6 13.29,44.65 v1(14.16,44.65)
  TOP w0.635: C50.1 37.88,23.86 37.12,24.61 37.12,26.11 v3(37.14,26.13) U11.4 U11.2 ; U17.6 U17.5 U17.4 34.24,8.86 C53.1 v1(36.34,10.96) ; C36.1 v1(27.91,14.35) 28.06,14.21 C34.1
  BOTTOM w0.127: v1(16,21.88) C10.1 17.38,21.76 C4.1
  BOTTOM w0.203: v1(8.85,29.15) 10.01,27.98 C11.1 10.79,27.98 C13.1 ; v1(13.79,22.73) 13.79,23.31 C9.1 14.99,24.51 C12.1 ; C3.1 11.63,24.03 v1(11.63,23.46) ; v1(16.9,30.45) 15.6,29.14 15.6,28.07 15.04,27.51 15.04,26.92 R16.1 ; C20.1 10.88,24.72 v1(10.22,24.72)
  BOTTOM w0.254: J2.11 26.61,16.16 26.61,16.16 26.61,14.76 27.01,14.35 27.41,14.35 27.41,14.35 v1(27.91,14.35)
  vias: v2(5.37,13.85) v2(5.47,11.66) v2(39.52,8.31)
DTR: length 7.4
  BOTTOM w0.127: 28.61,40.24 28.61,42.15 28.6,42.15 ; 28.6,42.15 R21.1 28.16,40.21 28.16,40.21 Q2.3 ; 28.6,42.15 28.6,42.16 J51.3
DVP_HREF: length 16.7
  TOP w0.127: v1(25.25,18.64) 24.96,18.64 arc(24.74,18.69) 24.55,18.81 23.88,19.48 arc(23.71,19.6) 23.51,19.64 arc(23.08,19.72) 22.72,19.96 18.69,23.99 18.69,26.25 17.68,27.26 17.68,28.61 17.32,28.97 17.29,28.97 17.28,28.98 17.1,28.98 16.64,28.52 U2.16
  BOTTOM w0.127: v1(25.25,18.64) 25.56,18.33 25.56,18.31 25.61,18.26 J2.9
DVP_PCLK: length 18.7
  TOP w0.127: v1(29.61,18.46) 29.17,18.02 24.92,18.02 23.78,19.16 arc(23.59,19.29) 23.35,19.33 23.26,19.33 arc(23.01,19.38) 22.8,19.52 18.44,23.88 18.44,26.14 18.01,26.57 17.8,26.57 U2.14
  BOTTOM w0.127: v1(29.61,18.46) J2.17
DVP_VSYNC: length 21.2
  TOP w0.127: U2.34 v1(10.34,29.58)
  BOTTOM w0.127: J2.7 24.61,18.39 18.56,24.45 16.64,24.45 11.89,29.2 10.72,29.2 v1(10.34,29.58)
DVP_Y2: length 21.6
  TOP w0.127: v1(30.61,15.49) 30.61,16.4 29.6,17.41 23.83,17.41 22.87,18.37 17.39,23.85 17.39,25.19 17.13,25.45 16.94,25.45 U2.10
  BOTTOM w0.127: v1(30.61,15.49) J2.19
DVP_Y3: length 26.5
  TOP w0.127: U2.20 16.2,30.07 16.2,30.07 16.4,30.27 16.4,30.61 16.76,30.97 17.03,30.97 18.19,29.8 18.19,27.52 19.2,26.51 19.2,24.26 22.15,21.31 arc(23.81,20.12) 25.77,19.53 arc(25.83,19.53) 25.89,19.52 arc(26.22,19.48) 26.56,19.45 arc(26.9,19.37) 27.19,19.17 27.36,19 arc(27.44,18.95) 27.54,18.93 28.51,18.93 arc(28.97,19.02) 29.36,19.28 arc(29.55,19.41) 29.78,19.46 v1(31.61,19.46)
  BOTTOM w0.127: J2.21 31.61,18.21 31.61,18.21 v1(31.61,19.46)
DVP_Y4: length 23.8
  TOP w0.127: U2.17 16.88,29.26 17.39,29.26 17.94,28.72 17.94,27.36 18.95,26.35 18.95,24.09 22.02,21.02 22.67,20.51 arc(22.76,20.45) 22.85,20.39 arc(23.35,20.08) 23.88,19.81 arc(24.01,19.74) 24.14,19.68 arc(25.03,19.31) 25.98,19.19 26.57,19.19 arc(26.76,19.15) 26.92,19.04 27.23,18.74 arc(27.33,18.67) 27.44,18.65 29.05,18.65 arc(29.16,18.67) 29.26,18.74 29.65,19.13 30.93,19.13 31.66,18.4 v1(32.11,18.4)
  BOTTOM w0.127: J2.22 32.11,18.21 32.11,18.21 v1(32.11,18.4)
DVP_Y5: length 20.9
  TOP w0.127: v1(31.11,16.04) 31.11,16.48 29.86,17.74 23.87,17.74 17.65,23.96 17.65,25.3 16.69,26.26 U2.11
  BOTTOM w0.127: v1(31.11,16.04) J2.20
DVP_Y6: length 19.9
  TOP w0.127: U2.8 15.89,25.48 16.3,25.07 16.3,25.03 16.5,24.83 16.5,24.82 16.77,24.56 16.77,24.56 16.86,24.47 16.86,24.41 16.86,24 21.74,19.12 21.76,19.12 23.8,17.08 29.51,17.08 30.11,16.48 v1(30.11,16.04)
  BOTTOM w0.127: J2.18 v1(30.11,16.04)
DVP_Y7: length 19.1
  TOP w0.127: U2.7 16.61,24.3 16.61,23.9 23.72,16.79 28.99,16.79 29.11,16.66 v1(29.11,16.04)
  BOTTOM w0.127: v1(29.11,16.04) J2.16
DVP_Y8: length 17.8
  TOP w0.127: U2.6 16.35,24.06 16.35,23.79 23.65,16.49 27.66,16.49 v1(28.11,16.04)
  BOTTOM w0.127: J2.14 v1(28.11,16.04)
DVP_Y9: length 16.9
  TOP w0.127: U2.5 15.16,24.77 16.1,23.83 16.1,23.69 23.75,16.04 v1(27.11,16.04)
  BOTTOM w0.127: v1(27.11,16.04) J2.12
EN: length 26.5
  TOP w0.127: SW2.2 29.86,36.91 29.55,37.23 v1(29.55,38.36) ; U2.9 16.89,25.01 v1(16.95,25.01)
  BOTTOM w0.127: Q1.2 v1(29.55,38.36) 29.55,36.02 28.99,35.46 24.5,35.46 19.85,30.81 19.85,29.79 C22.1 R16.2 16.63,25.32 16.63,25.32 v1(16.95,25.01)
FLASH_CLK: length 11.7
  TOP w0.127: v1(6.85,36.61) 11.02,32.45 11.02,30.39 U2.31
  BOTTOM w0.203: v1(6.85,36.61) 6.5,36.27 6.42,36.27 U3.6
G: length 17.5
  TOP w0.203: U2.38 9.79,28.15 v1(9.16,28.15)
  TOP w0.254: v1(7.07,17.58) v1(3.54,21.1)
  SIG w0.203: v1(9.16,28.15) 9.16,26.74 4.12,21.69
  SIG w0.254: 4.12,21.69 3.54,21.12 v1(3.54,21.1)
  BOTTOM w0.254: Q4.1 v1(7.07,17.58)
I2C_SCL: length 30.6
  TOP w0.127: v1(9.09,30.74) 9.09,29.7 9.98,28.81 10.11,28.81 10.65,28.27 U2.36 ; R36.1 22.82,12.66 v1(22.82,13.28)
  BOTTOM w0.127: v1(22.82,13.28) 22.82,14.56 23.61,15.35 J2.5 23.61,17.97 22.98,18.61 22.98,19.61 18.44,24.15 16.45,24.15 11.67,28.93 10.31,28.93 9.9,29.35 9.9,29.76 10.11,29.97 10.11,30.76 9.81,31.06 9.41,31.06 v1(9.09,30.74)
I2C_SDA: length 28
  TOP w0.127: v1(21.68,13.31) 21.68,12.67 R37.1 ; U2.35 10.35,29.08 10.07,29.08 9.62,29.53 v1(9.62,30.4)
  BOTTOM w0.127: v1(21.68,13.31) 21.68,15.23 22.61,16.16 J2.3 22.61,19.44 18.2,23.86 16.38,23.86 11.62,28.61 10.16,28.61 9.62,29.14 v1(9.62,30.4)
IO0: length 23.3
  TOP w0.127: U2.23 15.47,30.82 15.63,30.82 v1(15.94,31.14) ; v1(24.45,38.36) 23.72,38.36 SW1.2
  BOTTOM w0.127: v1(15.94,31.14) 15.94,31.58 15.97,31.6 15.97,34.55 19.03,37.61 23.7,37.61 v1(24.45,38.36) Q2.2
IO4: length 23
  TOP w0.127: U2.24 15.82,31.67 16.69,31.67 18.45,29.91 18.45,27.63 19.46,26.62 19.46,24.42 19.58,24.27 22.22,21.64 arc(24.36,20.2) 26.89,19.7 arc(27.28,19.62) v1(27.61,19.4)
  BOTTOM w0.127: J2.13 v1(27.61,19.4)
IO12: length 4.2
  TOP w0.127: v1(17.04,29.71) 16.83,29.71 U2.18 ; R9.2 18.9,30.66 v1(18.9,30.63)
  BOTTOM w0.127: v1(17.04,29.71) 17.57,30.24 18.51,30.24 v1(18.9,30.63)
IO16: length 19.2
  TOP w0.127: v1(10.17,32.58) 6.06,36.7 6.06,37.2 5.3,37.96 4.52,37.96 U4.1 1.66,35.11 1.66,35.11 v1(1.34,34.79) ; v1(12.89,33.43) 12.89,31.49 13.38,30.99
  BOTTOM w0.127: R10.2 v1(1.34,34.79) ; v1(10.17,32.58) 11.02,33.43 v1(12.89,33.43)
IO17: length 10.7
  TOP w0.127: U2.27 12.3,31.08 12.3,32.87 10.73,34.45 10.73,34.88 8.53,37.08 8.53,38.39 9.28,39.13 U4.6
IO21: length 14.6
  TOP w0.127: U2.42 10.8,25.16 10.41,25.16 10.41,25.17 10.04,25.17 10.04,25.16 8.75,25.16 7.87,26.05 v1(7.39,26.05)
  SIG w0.127: v1(7.39,26.05) v1(2.52,21.17)
  BOTTOM w0.127: 4.62,19.07 4.63,19.06 4.63,19.01
  BOTTOM w0.254: Q3.1 4.62,19.07 v1(2.52,21.17)
LED_B: length 129
  BOTTOM w0.381: R71.1 31.21,4.77 ; 31.21,4.77 31.21,5.68 34.29,8.76 36.96,8.76 38.3,7.41 40.8,7.41 R80.1 41.27,8.12 arc(41.09,8.38) 41.03,8.69 arc(41.15,9.26) 41.47,9.74 44.11,12.38 arc(44.62,12.67) 45.21,12.66 arc(45.95,12.81) 46.57,13.23 51.23,17.88 arc(51.55,18.37) 51.67,18.94 arc(51.37,20.45) 50.52,21.73 48.16,24.09 arc(47.16,25.58) 46.81,27.34 arc(47.35,30.05) 48.89,32.36 50.03,33.5 arc(50.19,33.74) 50.25,34.03 50.25,37.15 43.97,43.43 43.97,45.01 42.15,46.84 41.88,46.84 41.84,46.8 R83.1 arc(37.99,49.06) 34,49.85 23.49,49.85 arc(23,50.06) 22.8,50.54 R74.1 arc(18.65,49.72) 15.13,47.37 R86.1 ; 31.21,4.77 30.35,5.63 30.35,7.94 28.98,9.31 arc(26.76,10.23) 24.55,9.31 22.88,7.64 arc(20.01,5.72) 16.62,5.05 arc(14.53,6.36) 12.66,7.97 12.23,8.4 12.23,10.95 9.37,13.81 8.83,13.81 8.53,13.52 R77.1 7.67,14.37 Q5.2
LED_G: length 137.4
  BOTTOM w0.381: Q4.2 4.66,15.17 5.07,15.17 R78.1 8.06,12.65 8.1,12.68 8.46,12.68 10.68,10.47 10.68,8.4 11.53,7.54 arc(13.87,5.53) 16.5,3.9 arc(20.31,4.66) 23.55,6.82 25.75,9.02 arc(26.1,9.26) 26.53,9.34 27.1,9.34 arc(28.93,8.59) 29.69,6.75 29.69,4.71 31.24,3.16 32.04,3.16 R72.1 arc(32.27,3.98) 32.44,4.4 32.92,4.87 32.92,5.14 32.91,5.14 arc(32.92,5.17) 32.92,5.2 arc(32.96,5.36) 33.05,5.49 34.2,6.64 41.87,6.64 R81.1 42.2,7.31 42.2,7.92 42.7,8.41 42.7,9.2 44.37,10.88 45.11,10.88 arc(45.26,10.91) 45.38,10.99 51.78,17.38 arc(52.41,18.32) 52.63,19.42 arc(52.4,20.54) 51.77,21.49 48.93,24.32 arc(48,25.72) 47.68,27.36 arc(48.14,29.7) 49.47,31.69 51.1,33.32 51.1,37.31 45.18,43.24 45.18,44.09 45.49,44.4 45.49,45.22 43.05,47.66 42.75,47.66 42.72,47.62 R84.1 arc(38.26,50.29) 33.55,51.23 23.71,51.23 arc(23.39,51.29) 23.12,51.48 23.01,51.59 arc(22.86,51.81) R75.1 arc(18.45,51.19) 14.75,48.72 R87.1
LED_R: length 149.1
  BOTTOM w0.254: R82.1 42.67,5.7
  BOTTOM w0.381: Q3.2 2.95,17.33 2.95,15.25 6.04,12.17 6.27,12.17 R79.1 6.65,11.77 6.37,11.49 arc(6.15,10.97) 6.37,10.45 7.27,9.55 arc(11.98,5.67) 17.34,2.78 arc(20.57,3.42) 23.31,5.25 26.26,8.2 arc(26.56,8.4) 26.91,8.47 27.61,8.47 arc(27.98,8.4) 28.29,8.19 arc(28.84,7.36) 29.04,6.38 29.04,4.64 31.36,2.32 32.87,2.32 R73.1 34.03,1.97 arc(38.57,2.88) 42.42,5.45 R82.1 43.45,6.09 arc(43.59,5.99) 43.76,5.96 arc(44.05,6.02) 44.3,6.18 46.97,8.85 arc(47.62,9.82) 47.85,10.97 arc(48.17,12.6) 49.09,13.98 52.14,17.02 arc(52.54,17.51) 52.85,18.06 arc(52.93,18.23) 53.02,18.4 arc(53.4,19.43) 53.4,20.52 53.33,20.92 arc(52.97,21.98) 52.31,22.88 51.54,23.65 arc(51.19,23.92) 50.79,24.1 50.34,24.24 48.96,25.63 arc(48.47,26.42) 48.39,27.35 48.49,28.07 arc(48.49,28.09) 48.49,28.11 arc(48.76,29.26) 49.43,30.23 49.67,30.47 arc(50.12,30.77) 50.66,30.88 52.28,30.88 arc(52.81,30.98) 53.26,31.28 arc(53.65,31.86) 53.78,32.55 53.78,33.47 arc(53.73,33.75) 53.57,33.99 arc(52.98,34.88) 52.77,35.92 52.77,35.96 arc(52.6,36.83) 52.12,37.58 arc(52.12,37.58) 52.12,37.58 arc(52.07,37.64) 52.03,37.7 51.85,37.89 arc(51.64,38.2) 51.56,38.58 arc(51.55,38.89) 51.52,39.21 arc(51.51,39.3) 51.49,39.39 arc(51.49,39.41) 51.48,39.44 arc(51.02,40.77) 50.19,41.9 49.1,42.98 arc(49.01,43.1) 48.94,43.24 arc(48.85,43.41) 48.72,43.55 arc(48.64,43.83) 48.62,44.12 arc(48.59,44.27) 48.5,44.4 44.44,48.46 arc(44.11,48.68) 43.71,48.76 43.47,48.76 43.15,48.44 R85.1 arc(38.24,51.71) 32.46,52.86 23.42,52.86 22.76,53.51 R76.1 arc(18.17,52.65) 14.28,50.05 R88.1
PWDN: length 4.3
  TOP w0.127: v1(25.37,13.73) 25.37,14.07 R34.2
  BOTTOM w0.127: J2.8 25.11,13.98 v1(25.37,13.73)
RTS: length 5.3
  BOTTOM w0.127: R70.1 33.04,40.21 33.04,40.21 Q1.3 31.14,40.67 31.14,40.68 J51.4
RXD0: length 32.7
  TOP w0.127: v1(9.41,26.24) 9.9,25.75 10.38,25.75 10.89,26.26 U2.40 ; v1(7.16,28.85) 7.16,28.5 v1(8.06,27.6)
  BOTTOM w0.127: J51.2 23.97,41.01 23.97,38.61 23.97,38.61 23.97,38.31 23.55,37.89 18.78,37.89 13.8,32.92 11.59,32.92 10.71,32.04 8.92,32.04 7.16,30.27 v1(7.16,28.85) ; v1(9.41,26.24) v1(8.06,27.6)
SCS/CMD: length 14.6
  TOP w0.127: v1(5.77,39.29) 5.77,38.53 9.82,34.48 9.82,34 11.3,32.52 11.3,30.6 U2.30
  BOTTOM w0.203: v1(5.77,39.29) 6.11,39.63 6.18,39.63 U3.1
SDI/SD1: length 14.5
  TOP w0.127: U4.5 9.13,37.19 v1(9.13,37.19) ; U2.33 10.84,29.57 10.84,29.71 10.36,30.19 10.36,31.25 7.74,33.87 6.92,33.87 v1(6.65,33.6)
  BOTTOM w0.127: v1(6.65,33.6) 6.33,33.6 U3.5 6.77,34.83 6.78,34.83 v1(9.13,37.19)
SDO/SD0: length 16.4
  TOP w0.127: U2.32 10.63,30.28 10.63,31.43 5.43,36.63 v1(5.43,37.07)
  TOP w0.203: v1(5.43,37.07) 5.09,36.73 5.08,36.73 U4.2
  BOTTOM w0.203: U3.2 5.95,37.61 5.95,37.6 v1(5.43,37.07)
SHD/SD2: length 16.8
  TOP w0.127: U2.28 11.96,30.93 11.96,32.8 10.41,34.35 10.41,34.84 8.1,37.15 8.1,37.73 7.97,37.86 7.97,38.15 v1(7.66,38.46) 7.66,39.31 U4.7
  BOTTOM w0.203: U3.7 4.26,35.79 5.06,36.59 5.79,36.59 v1(7.66,38.46)
SWP/SD3: length 19.1
  TOP w0.127: U2.29 11.63,30.76 11.63,32.67 10.07,34.23 10.07,34.69 7.66,37.1 v1(7.66,37.55) ; U4.3 v1(4.04,33.89)
  BOTTOM w0.127: v1(4.04,33.89) 4.35,33.58 4.64,33.58 7.66,36.6 v1(7.66,37.55)
  BOTTOM w0.203: U3.3 8.03,37.89 8,37.89 v1(7.66,37.55)
TXD0: length 3.6
  BOTTOM w0.127: R3.2 23.53,42.15 23.52,42.16 J51.1
N16860839: length 7.9
  TOP w0.127: v1(12.74,22.47) 12.74,23.27 12.46,23.56 12.46,23.85 12.88,24.28 U2.48 ; 12.02,19.74 v1(12.02,19.74)
  TOP w0.203: R1.2 12.02,19.74 11.45,19.74 C5.1 10.98,20.26 C6.2
  BOTTOM w0.127: v1(12.74,22.47) 12.74,20.47 v1(12.02,19.74)
N16860948: length 2.2
  TOP w0.127: U2.4 U2.3
  TOP w0.203: L5.1 15.79,23.14 U2.3
N16861170: length 3.8
  TOP w0.254: C14.2 16.34,18.68 16.33,18.68 C15.2 15.62,17.97 15.62,17.96 J39.1
N16861179: length 7.3
  TOP w0.203: U2.44 10.76,24.13 9.62,24.13 9.61,24.14 9.18,24.14 8.39,23.34 6.97,23.34 U1.3 5.89,24.42 C2.1
N16861214: length 2.8
  TOP w0.203: U1.1 10.24,22.33 10.24,22.33 R2.1 C1.1
N16861260: length 4.4
  TOP w0.127: C6.1 12.29,23.34 12.08,23.54 12.08,23.96 U2.47
  TOP w0.203: C6.1 12.29,21.55 R1.1
N16861530: length 28.7
  TOP w0.127: v1(6.31,28.95) 6.31,28.37 v1(7.85,26.83) ; v1(8.94,25.73) 9.26,25.42 9.93,25.42 9.93,25.42 10.56,25.42 10.59,25.45 10.6,25.45 U2.41
  BOTTOM w0.127: R3.1 18.9,38.64 14.24,33.97 10.43,33.97 6.31,29.85 v1(6.31,28.95) ; v1(8.94,25.73) v1(7.85,26.83)
N16861598: length 3.2
  TOP w0.203: U2.45 11.13,24.01 11.13,22.71 R2.2
N16884685: length 5.7
  TOP w0.203: C14.1 16.03,20.28 arc(15.49,21.08) 15.31,22.03 15.31,22.71 arc(15.23,23.1) 15.01,23.43 U2.2
  TOP w0.254: L4.1 17.07,20.69 C14.1
N16908427: length 7.7
  TOP w0.127: v1(26.94,39.45) v1(32.19,39.45)
  BOTTOM w0.127: R70.2 33.09,39.31 32.94,39.45 v1(32.19,39.45) ; Q2.1 v1(26.94,39.45)
N16908429: length 5.5
  TOP w0.127: v1(31.15,38.96) v1(27.81,38.96)
  BOTTOM w0.127: v1(27.81,38.96) 28.26,38.96 R21.2 ; v1(31.15,38.96) 31.15,38.91 31.7,38.36 Q1.1
N16960286: length 6.8
  TOP w0.381: U17.3 35.88,7.22 35.83,7.22 v1(35.43,7.62)
  BOTTOM w0.381: R71.2 32.25,5.49 34.38,7.62 v1(35.43,7.62)
N16960306: length 4.4
  TOP w0.381: U17.2 v1(34.97,6)
  BOTTOM w0.381: R72.2 33.44,4.56 33.44,5.07 34.38,6 v1(34.97,6)
N16960332: length 3.1
  TOP w0.381: v1(34.07,4.83) 34.07,4.78 U17.1
  BOTTOM w0.381: R73.2 34.46,3.91 34.46,4.45 v1(34.07,4.83)
N16960785: length 1.6
  TOP w0.381: U18.3 v1(24.26,50.55)
  BOTTOM w0.381: R74.2 23.7,50.55 v1(24.26,50.55)
N16960795: length 1.6
  TOP w0.381: U18.2 v1(24.18,52.05)
  BOTTOM w0.381: R75.2 23.72,52.05 v1(24.18,52.05)
N16960797: length 1.7
  TOP w0.381: U18.1 v1(24.27,53.55)
  BOTTOM w0.381: R76.2 23.68,53.55 v1(24.27,53.55)
N16961158: length 6.9
  TOP w0.381: v1(11.52,9.36) 11.12,8.96 11.09,8.96 U19.3
  BOTTOM w0.381: R77.2 9.56,12.48 9.68,12.48 11.52,10.65 v1(11.52,9.36)
N16961160: length 4.6
  TOP w0.381: U19.2 9.7,9.69 9.7,9.69 v1(10.11,10.1)
  BOTTOM w0.381: v1(10.11,10.1) 9.27,10.93 9.27,11.05 8.94,11.39 8.85,11.39 R78.2
N16961162: length 3.1
  TOP w0.381: U19.1 v1(8.7,10.82)
  BOTTOM w0.381: R79.2 7.89,10.55 8.43,10.55 v1(8.7,10.82)
N16961522: length 7.3
  TOP w0.254: U20.3 45.44,11.33 45.44,11.33 v1(45.08,11.69)
  BOTTOM w0.254: R80.2 42.03,9.42 44.3,11.69 v1(45.08,11.69)
N16961524: length 4.7
  TOP w0.254: U20.2 v1(44.78,9.88)
  BOTTOM w0.254: v1(44.78,9.88) 44.17,9.88 43.21,8.92 43.21,7.98 R81.2
N16961526: length 3.7
  TOP w0.254: U20.1 v1(43.77,8.76)
  BOTTOM w0.254: v1(43.77,8.76) 44.37,8.17 44.37,7.4 R82.2
N16961899: length 5.2
  TOP w0.254: 43.95,46 44.79,46.84 U21.3
  TOP w0.381: U21.3 43.48,45.51 43.48,45.51 v1(43.07,45.1)
  BOTTOM w0.381: v1(43.07,45.1) R83.2
N16961901: length 4.4
  TOP w0.381: v1(44.88,44.8) U21.2
  BOTTOM w0.381: v1(44.88,44.8) 44.48,45.2 44.48,45.27 44.48,45.27 44.48,45.39 R84.2
N16961903: length 6.9
  TOP w0.381: v1(45.86,43.66) 46.92,44.72 U21.1
  BOTTOM w0.381: R85.2 46.34,45.23 46.34,44.14 v1(45.86,43.66)
N16962291: length 6.7
  TOP w0.381: U22.3 v1(9.17,43.37)
  BOTTOM w0.381: R86.2 11.13,43.37 v1(9.17,43.37)
N16962293: length 4.3
  TOP w0.381: U22.2 v1(9.82,44.85)
  BOTTOM w0.381: v1(9.82,44.85) 10.88,44.85 R87.2
N16962295: length 2.4
  TOP w0.381: v1(10.75,46.03) 9.88,46.9 U22.1
  BOTTOM w0.381: v1(10.75,46.03) 10.75,46.52 R88.2

## Copper pours and planes (outline as drawn; the poured copper is in the pictures)
AGND on TOP: 0.01,30.43 27.32,54.82 54.64,30.43 53.14,30.43 50.03,27.32 53.14,24.22 54.64,24.22 46.77,7.88 30.43,0.01 30.43,1.51 27.32,4.62 24.22,1.51 24.22,0.01 7.88,7.88 0.01,24.22 1.51,24.22 4.62,27.32 1.51,30.43 ; 19 cut-outs
AGND on BOTTOM: 30.68,1.51 27.32,4.87 23.97,1.51 23.97,0.29 8.06,8.06 0.29,23.97 1.51,23.97 4.87,27.32 1.51,30.68 0.29,30.68 27.32,54.57 54.36,30.68 53.14,30.68 49.78,27.32 53.14,23.97 54.36,23.97 46.59,8.06 30.68,0.29 ; 42 cut-outs
AGND on GND: 0.01,30.43 27.32,54.82 54.64,30.43 53.14,30.43 50.03,27.32 53.14,24.22 54.64,24.22 46.77,7.88 30.43,0.01 30.43,1.51 27.32,4.62 24.22,1.51 24.22,0.01 7.88,7.88 0.01,24.22 1.51,24.22 4.62,27.32 1.51,30.43
DOVDD_3V3 on SIG: 0.01,30.43 27.32,54.82 54.64,30.43 53.14,30.43 50.03,27.32 53.14,24.22 54.64,24.22 46.77,7.88 30.43,0.01 30.43,1.51 27.32,4.62 24.22,1.51 24.22,0.01 7.88,7.88 0.01,24.22 1.51,24.22 4.62,27.32 1.51,30.43

## Text on the board
Ref Des/Silkscreen Bottom: TXD | RXD | DTR | RTS | GND | 5V
User.Comments: tTXD
Ref Des/Silkscreen Top: RST | DL | TXD | RXD | DTR | RTS | GND | 5V
NCLEGEND-1-4: FIGURE | SIZE | 12.0 | 20.0 | 25.0 | 35.429 | 35.433 | DRILL CHART: TOP to BOTTOM | ALL UNITS ARE IN MILS | PLATED | QTY | 88 | 477 | 1 | 2 | 4
